# Altium PCB Flow_Pump.PcbDoc (part 3 of 3)
Units mm, origin at the board's own origin, x right, y up, seen from the top; angles counter-clockwise.
Board outline 210 x 210 mm, 2 copper layers (Top Layer, Bottom Layer); 227 components, 178 nets, 654 pads, 724 vias.
Unrouted connection lines stored in the file: 221.
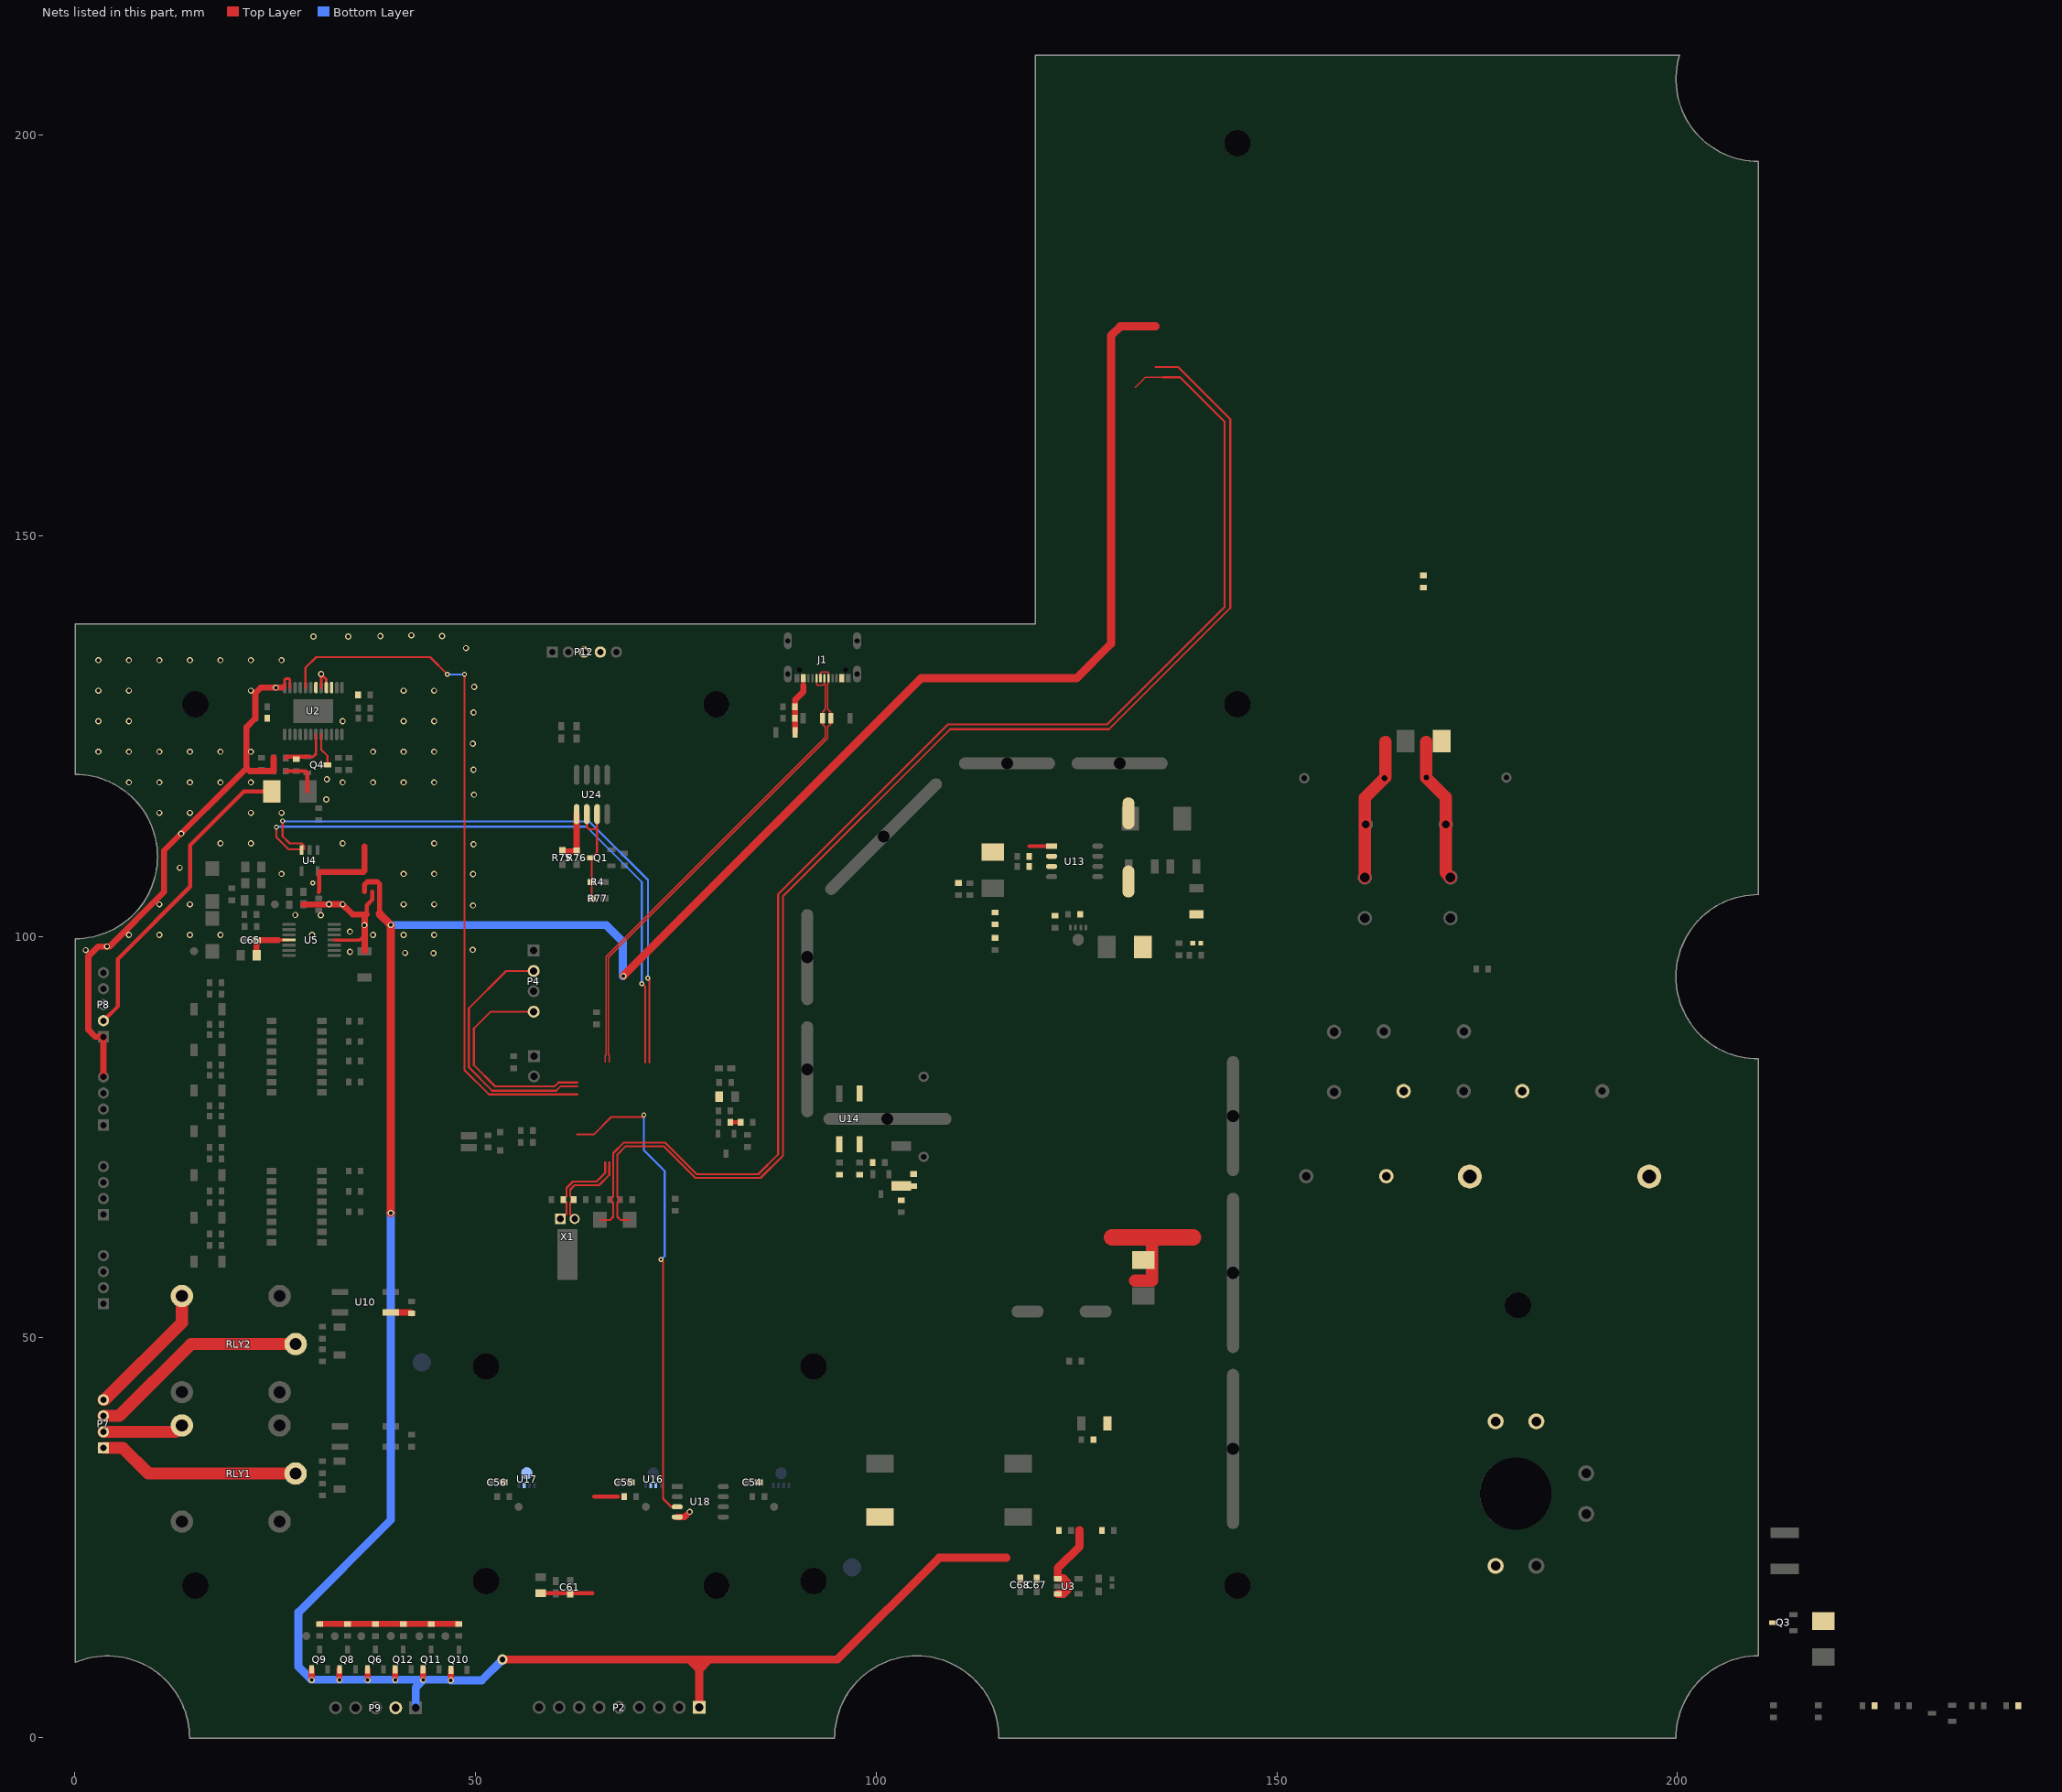
[diagram p3: the nets of this part, all layers, seen from the top]

## Via types
v1: diameter 0.762, hole 0.457, Top Layer to Bottom Layer, tented both sides, 554 vias
v2: diameter 0.61, hole 0.305, Top Layer to Bottom Layer, tented both sides, 99 vias
v3: diameter 0.45, hole 0.25, Top Layer to Bottom Layer, tented both sides, 70 vias
v4: diameter 1.27, hole 0.711, Top Layer to Bottom Layer, tented both sides, 1 vias

## Nets (pads, with @x,y where several pads share a name; then routed paths per layer and width w, separated by ;. In a path a pad name is that pad's centre, name@x,y a point inside that pad or via, vN(x,y) a via of type N, cw(c..) or ccw(c..) an arc to the next point about the centre after c; other vN are vias at no path point) (continued)
NetR45_1: R45.1 U10.1 | length 2.7
  Top Layer w0.762: U10.1@39.418,53.091 41.929,53.091 R45.1@42.037,52.983
NetR61_1: R61.1
NetR62_1: R62.1
NetR63_1: R63.1
NetR83_2: R83.2 R84.1 | length 1.3
  Top Layer w0.508: R83.2@81.788,76.835 R84.1@83.082,76.835
op_3.3v: C65.1 FB2.2 U5.4 | length 5.9
  Top Layer w0.33: 25.385,99.552 25.4,99.567 U5.4@26.712,99.567
  Top Layer w0.762: FB2.2@22.674,97.662 C65.1@22.674,99.552 25.385,99.552
osc_in: C5.1 X1.2 | length 11.2
  Top Layer w0.254: X1.2@60.796,64.86 61.341,65.405 61.341,66.802 C5.1@60.96,67.183 61.341,67.564 61.341,68.617 62.142,69.418 65.1,69.418 66.184,70.502 66.184,71.795
osc_out: C6.1 X1.1 | length 11.4
  Top Layer w0.254: X1.1@62.357,64.77 61.812,65.315 61.812,66.765 C6.1@62.23,67.183 61.798,67.615 61.798,68.402 62.357,68.961 65.405,68.961 66.684,70.24 66.684,71.795
PWM: R59.1
relay_A1: P7.3 RLY2.5 | length 27.7
  Top Layer w1.524: P7.3@3.556,40.186 5.515,40.186 14.478,49.149 RLY2.5@27.547,49.149
relay_A2: P7.1 RLY1.5 | length 25.3
  Top Layer w1.524: P7.1@3.556,36.186 5.978,36.186 9.174,32.99 RLY1.5@27.535,32.99
relay_B1: P7.4 RLY2.2 | length 17.1
  Top Layer w1.524: P7.4@3.556,42.186 3.705,42.186 13.347,51.828 RLY2.2@13.347,55.148
relay_B2: P7.2 RLY1.2 | length 10.1
  Top Layer w1.524: P7.2@3.556,38.186 12.532,38.186 RLY1.2@13.335,38.989
RESX: 
RS485_DIR: Q1.3 Q3.3 Q4.3 R4.1 R16.1 R17.1 R49.2 R50.2 R77.2 U13.2 U13.3 U14.2 U14.3 U24.2 U24.3 | length 13.8
  Top Layer w0.254: U24.2@63.881,115.279 63.881,113.665 64.135,113.411 65.151,113.411 ; R77.2@64.491,104.775 R4.1@64.491,106.807 64.491,109.78 Q1.3@64.429,109.842 65.151,110.564 65.151,113.411 ; U24.3@65.151,115.279 65.151,113.411
rs4851_N: D5.2 FB3.2 P12.3 | length 60.8
  Top Layer w0.254: 62.684,75.295 64.754,75.295 66.929,77.47 70.866,77.47 70.993,77.597 v2(70.993,77.724) ; v2(73.152,59.69) 73.406,59.436 73.406,29.845 74.417,28.834 75.159,28.834
  Bottom Layer w0.254: v2(70.993,77.724) 70.993,73.33 73.584,70.739 73.584,60.122 v2(73.152,59.69)
rs4851_P: D14.2 FB1.2 P12.4
rs4852_N: D18.2 | length 17.6
  Top Layer w1.524: 132.3,57.079 134.4,57.079 134.4,62.386 134.461,62.447
  Top Layer w2.032: 129.411,62.447 134.461,62.447 139.511,62.447
rs4852_P: D19.2
rs4853_N: D20.2
rs4853_P: D21.2
RTN: C42.2 C44.2 C45.2 P10.1 R64.1
RUN: 
RX_5V: R15.1 R18.1 R46.1 R75.1 R76.1 U13.1 U14.1 U24.1 | length 9.2
  Top Layer w0.508: 119.1,111.289 U13.1@121.883,111.289
  Top Layer w0.762: R75.1@60.833,110.642 62.586,110.642 R76.1@62.611,110.617 U24.1@62.611,115.279
SCL: 
SCLK_AO: U2.6 | length 88.5
  Top Layer w0.254: 28.775,131.068 28.775,133.55 30.099,134.874 44.323,134.874 v2(46.482,132.715) ; v2(48.616,132.715) 48.616,83.337 51.658,80.295 62.684,80.295
  Bottom Layer w0.254: v2(46.482,132.715) v2(48.616,132.715)
SDA: P3.2 | length 5.1
  Top Layer w0.508: 26.308,120.65 27.602,120.65 28.777,120.65 28.999,120.428 28.999,118.194 29.083,118.11
SIOUT0: P8.2 R6.2 R9.2 | length 39.9
  Top Layer w0.508: P8.2@3.556,89.494 5.372,91.31 5.372,97.218 14.376,106.223 14.376,111.404 21.082,118.11 25.083,118.11
SW1:  | length 174
  Top Layer w0.203: 132.334,168.529 133.59,169.785 135.763,169.785
  Top Layer w0.254: 65.509,64.643 66.802,64.643 67.183,65.024 67.183,66.788 66.788,67.183 67.184,67.579 67.184,71.795 67.184,72.969 68.51,74.295 73.635,74.295 77.597,70.333 85.279,70.333 87.757,72.811 87.757,105.283 108.941,126.467 128.803,126.467 143.459,141.122 143.459,164.262 137.936,169.785 135.763,169.785
SW2:  | length 172.3
  Top Layer w0.254: 69.209,64.643 68.072,64.643 67.691,65.024 67.691,66.825 68.049,67.183 67.684,67.548 67.684,71.795 67.684,72.779 68.743,73.838 73.457,73.838 77.419,69.875 85.573,69.875 88.362,72.665 88.362,105.024 109.22,125.882 129.057,125.882 144.17,140.995 144.17,164.567 137.668,171.069 134.874,171.069
SWCLK: P4.2 | length 32.3
  Top Layer w0.254: P4.2@57.252,95.707 53.818,95.707 49.149,91.038 49.149,83.693 52.07,80.772 60.071,80.772 60.591,81.292 62.684,81.292 62.684,81.295
SWD: P4.4 | length 27.1
  Top Layer w0.254: P4.4@57.252,90.627 51.892,90.627 49.784,88.519 49.784,83.947 52.436,81.295 59.832,81.295 60.332,81.795 62.684,81.795
TE: 
USB_N: D3.2 J1.A7 J1.B7 | length 62
  Top Layer w0.152: 66.684,84.295 66.684,85.171 66.586,85.269 66.586,97.356 93.953,124.723 93.953,126.136 94.32,126.503 D3.2@94.32,127.254 94.32,128.005 93.943,128.382 93.943,131.518 94.041,131.615 J1.B7@94.041,132.232 94.041,132.883 93.929,132.994 93.167,132.994 93.041,132.868 J1.A7@93.041,132.232
USB_P: D4.2 J1.A6 J1.B6 | length 61.5
  Top Layer w0.152: 66.184,84.295 66.184,85.171 66.282,85.269 66.282,97.483 93.648,124.849 93.648,126.136 93.281,126.503 D4.2@93.281,127.254 93.281,128.005 93.639,128.363 93.639,131.518 93.541,131.615 ; J1.B6@92.541,132.232 92.541,131.512 92.685,131.369 93.294,131.369 93.541,131.615 ; J1.A6@93.541,132.232 93.541,131.615
VCC_3.3V_F: R57.2 R58.2 R59.2 | length 6.4
  Top Layer w0.254: 30.075,124.421 30.075,125.218
  Top Layer w0.33: 28.999,122.428 29.718,122.428 30.075,122.785 30.075,124.421
  Top Layer w0.508: 26.308,122.301 26.435,122.428 28.999,122.428
VCC_5V: C51.1 C52.1 C54.1 C55.1 C56.1 C61.1 C67.1 C68.1 L2.2 P2.1 P9.2 Q6.1 Q8.1 Q9.1 Q10.1 Q11.1 Q12.1 R53.2 U3.1 U3.3 U17.3 U17.5 | length 390.1
  Top Layer w0.635: 36.138,105.623 36.138,106.47 36.5,106.832 37.744,106.832 38.038,106.539 38.038,105.623 38.038,102.822
  Top Layer w0.762: v1(29.531,7.223) Q9.1@29.531,8.543 ; v1(33.01,7.223) Q8.1@33.01,8.543 ; v1(36.516,7.223) Q6.1@36.516,8.543 ; v1(39.968,7.223) Q12.1@39.968,8.543 ; v1(43.45,7.223) Q11.1@43.45,8.543 ; v1(46.914,7.183) Q10.1@46.914,8.503
  Top Layer w1.016: 38.038,102.822 v1(39.421,101.439) 39.421,99.898 v1(39.421,65.507) ; v4(53.365,9.779) 78.003,9.779 ; v1@68.478,95.123 105.588,132.232 124.993,132.232 129.286,136.525 129.286,174.981 130.454,176.149 132.334,176.149 134.874,176.149 ; 76.683,9.779 77.918,8.543 79.154,9.779 ; P2.1@77.92,3.81 77.92,9.696 78.003,9.779 ; 116.205,22.479 107.848,22.479 95.148,9.779 78.003,9.779 ; U3.3@122.652,17.973 123.383,17.973 123.825,18.415 123.825,19.431 123.317,19.939 122.652,19.939 122.652,21.179 125.373,23.9 125.373,25.908
  Bottom Layer w1.016: v1(39.421,65.507) 39.421,27.203 27.889,15.672 27.889,8.865 29.489,7.264 v1@46.965,7.264 ; v1(39.421,101.439) 66.303,101.439 68.351,99.391 v1@68.351,95.072 ; 42.527,3.75 42.527,6.3 v1(43.45,7.223) ; v1(46.914,7.183) 50.77,7.183 v4(53.365,9.779)
  other v1: 68.453,95.072
VCC_36V: C42.1 C50.1 F1.2 U16.2 U16.3 | length 4.1
  Top Layer w0.254: 30.725,125.218 30.725,123.326 31.499,122.552 31.499,121.428
VCC_36V_F: C71.2 C73.1 U18.3 U18.4 | length 96.2
  Top Layer w0.33: 26.175,131.068 26.175,132.049 26.333,132.207 26.67,132.207 26.825,132.052 26.825,131.068 ; 30.725,131.068 v1(30.725,132.757) 31.375,132.107 31.375,131.068
  Top Layer w0.381: 32.351,99.567 35.52,99.567 36.156,100.203
  Top Layer w0.508: 36.41,102.743 36.41,103.897 37.088,104.575 37.088,105.623
  Top Layer w0.762: 3.556,82.477 3.556,87.494 2.549,87.494 1.676,88.367 1.676,97.536 2.883,98.742 4.305,98.742 11.125,105.562 11.125,110.744 21.412,121.031 ; 24.808,122.301 24.808,120.65 21.793,120.65 21.412,121.031 ; 25.908,131.068 23.194,131.068 22.511,130.385 22.511,128.651 22.511,127.254 21.412,126.155 21.412,121.031 ; 28.516,104.013 30.403,104.013 v1@31.725,104.013 ; v1(31.699,104.038) 33.376,104.038 34.671,102.743 36.41,102.743 36.156,102.489 36.156,100.203 36.156,98.164 36.144,98.153 ; U18.4@75.159,27.564 76.078,27.564 v1(76.733,28.219)
  other v1: 44.755,97.917 41.199,97.968 34.315,98.095 1.346,98.298 49.632,98.335 3.988,98.755 6.731,100.203 10.541,100.203 14.351,100.203 18.161,100.203 29.591,100.203 37.211,100.203 41.021,100.203 44.831,100.203 34.315,100.635 36.131,101.422 30.683,102.667 27.508,102.692 49.682,103.886 10.541,104.013 14.351,104.013 33.401,104.013 41.021,104.013 44.831,104.013 49.682,107.798 25.781,107.823 41.021,107.823 44.831,107.823 13.081,108.585 49.733,111.506 18.161,111.633 21.971,111.633 33.401,111.633 44.831,111.633 13.259,112.852 10.541,115.443 14.351,115.443 21.971,115.443 25.781,115.443 31.375,117.119 49.784,117.704 6.731,119.253 10.541,119.253 14.351,119.253 18.161,119.253 21.971,119.253 33.401,119.253 37.211,119.253 41.021,119.253 44.831,119.253 31.445,119.634 49.733,120.828 2.921,123.063 6.731,123.063 10.541,123.063 14.351,123.063 18.161,123.063 21.971,123.063 37.211,123.063 41.021,123.063 44.831,123.063 49.657,124.079 2.921,126.873 6.731,126.873 33.401,126.873 41.021,126.873 44.831,126.873 49.733,127.965 2.921,130.683 6.731,130.683 21.971,130.683 41.021,130.683 44.831,130.683 25.07,131.068 49.835,131.166 2.921,134.493 6.731,134.493 10.541,134.493 14.351,134.493 18.161,134.493 21.971,134.493 25.781,134.493 48.793,135.992 29.769,137.439 34.112,137.439 38.125,137.49 45.822,137.49 41.986,137.592
  other v2: 29.667,106.68
VCC_36V_IN: C44.1 C45.1 F1.1 P10.2 | length 18
  Top Layer w1.524: 160.968,107.387 160.968,117.31 163.53,119.872 163.53,124.308
VCC_DVDD: C72.1 R60.2 R65.1 R66.1 | length 18.2
  Top Layer w1.524: 168.631,124.308 168.631,119.841 171.08,117.391 171.08,113.991 171.08,107.975 171.668,107.387
VCC_MCU_3.3V: R24.1 R38.1 R39.1 R92.1 R93.1 R94.1 | length 17.3
  Top Layer w0.762: R39.1@30.531,14.218 R38.1@34.01,14.218 R93.1@44.45,14.218 R92.1@47.875,14.218
VDS: R66.2 R68.1 | length 9.4
  Top Layer w0.508: 58.111,18.064 64.533,18.064 64.558,18.039 ; 64.78,30.104 67.748,30.104
VFB: U2.3 U2.4 U4.3 | length 164.3
  Top Layer w0.254: v2(25.146,113.665) 25.146,112.415 26.687,110.874 U4.3@28.153,110.874 ; v2(25.908,114.427) 25.908,112.522 26.797,111.633 28.321,111.633 28.603,111.351 28.603,110.874 ; v2(70.739,94.132) 71.184,93.687 71.184,84.295 ; v2(71.501,94.818) 71.684,94.635 71.684,84.295
  Top Layer w0.508: 30.403,105.562 30.484,105.643 30.484,108.074
  Top Layer w0.762: 30.611,108.074 36.004,108.074 36.138,108.207 36.138,108.573 36.138,111.245 36.131,111.252
  Bottom Layer w0.254: v2(25.146,113.665) 25.197,113.716 63.822,113.716 70.739,106.799 v2(70.739,94.132) ; v2(25.908,114.427) 25.959,114.376 64.186,114.376 71.501,107.061 v2(71.501,94.818)
VUSB: C3.2 C4.2 D2.2 J1.A4 J1.A9 J1.B4 J1.B9 | length 6.3
  Top Layer w0.762: D2.2@89.862,125.476 C4.2@89.862,127.254 C3.2@89.862,128.651 89.862,129.511 90.891,130.54 90.891,131.334
WARN: 
pads on no net: C7.0 C24.0 C54.0 C55.0 C56.0 C60.0 C61.0 C62.0 C65.0 C66.0 C67.0 C68.0 C69.0 C70.0 J1.2 J1.A5 J1.A8 J1.B5 J1.B8 P6.1 P8.3 P8.4 P8.5 P12.2 P12.5 R4.0 R21.0 R75.0 R76.0 R77.0 RLY1.3 RLY2.3 U2.9 U2.10 U2.11 U2.12 U2.13 U2.14 U2.15 U2.16 U2.17 U2.18 U2.19 U2.20 U2.21 U2.22 U2.23 U2.24 U2.25 U3.4 U5.5 U5.6 U5.7 U5.8 U5.9 U5.10 U5.12 U5.13 U5.14 U7.7 U7.8 U7.9 U7.10 U12.4 U15.4 U16.4 X1.3
copper on no net: | length 2435.3
  Top Layer w0.203: 132.334,165.989 133.604,167.259 135.416,167.259 ; 132.334,171.069 133.604,172.339 135.416,172.339
  Top Layer w0.254: 27.475,131.068 27.475,133.811 29.681,136.017 45.237,136.017 47.193,134.061 47.193,82.982 50.88,79.295 62.684,79.295 ; 28.125,131.068 28.125,133.721 29.913,135.509 44.679,135.509 v2(46.482,133.706) ; v1(28.153,107.223) 28.153,108.074 ; 28.603,108.074 28.603,108.799 29.278,109.474 29.503,109.249 29.503,108.074 29.503,107.581 29.616,107.467 29.794,107.467 29.951,107.624 29.951,108.074 ; 30.403,110.874 30.403,113.733 30.421,113.751 ; 43.272,28.829 42.291,28.829 41.504,29.616 41.504,33.68 44.145,36.322 44.145,62.941 49.708,68.504 v2(50.825,68.504) ; 43.272,30.099 42.443,30.099 42.037,30.505 42.037,33.565 44.704,36.232 44.704,62.687 49.835,67.818 v2(56.058,67.818) ; v2(47.93,133.579) 47.93,83.109 51.244,79.795 62.684,79.795 ; v2(49.276,77.216) 49.855,77.795 62.684,77.795 ; v2(50.165,76.708) 50.752,77.295 62.684,77.295 ; v2(51.486,67.107) 55.829,67.107 57.404,65.532 57.404,29.464 58.034,28.834 59.03,28.834 ; 53.487,27.564 54.351,27.564 v3(54.559,27.356) ; v2(56.439,69.063) 57.912,67.589 57.912,30.358 58.166,30.104 59.03,30.104 ; v2(60.681,75.108) 61.443,75.108 61.755,74.795 62.684,74.795 ; 62.684,76.295 65.043,76.295 66.624,77.876 68.91,77.876 74.066,83.033 74.066,95.885 107.29,129.108 127,129.108 139.852,141.961 139.852,163.906 136.5,167.259 135.416,167.259 ; 62.684,76.795 64.857,76.795 66.421,78.359 68.661,78.359 73.533,83.231 73.533,96.19 107.01,129.667 126.695,129.667 139.217,142.189 139.217,163.398 136.627,165.989 134.874,165.989 ; 63.564,135.509 63.564,135.318 64.262,134.62 64.262,122.047 63.881,121.666 63.881,120.179 ; 65.151,120.179 65.151,121.666 64.77,122.047 64.77,134.715 65.564,135.509 ; 66.058,21.96 66.058,18.397 66.416,18.039 67.158,18.039 67.158,16.944 ; 67.184,84.295 67.184,86.031 68.184,87.031 68.184,93.378 106.047,131.242 125.705,131.242 137.414,142.951 v2(137.414,159.893) ; 68.184,71.795 68.148,71.759 68.148,69.901 68.961,69.088 70.268,69.088 71.501,67.855 71.501,64.643 71.882,64.262 71.882,62.865 ; v2(68.834,70.355) 69.184,70.705 69.184,71.795 ; 69.362,27.564 70.226,27.564 v3(70.485,27.305) ; 69.684,71.795 69.684,70.397 v2(69.977,70.104) ; 69.684,84.295 69.684,92.719 69.317,93.086 69.317,93.701 106.299,130.683 125.984,130.683 138.1,142.799 138.1,160.223 137.414,160.909 134.874,160.909 ; 70.184,71.795 70.184,72.789 70.775,73.381 73.254,73.381 77.241,69.393 86.004,69.393 88.9,72.288 88.9,104.75 109.499,125.349 129.388,125.349 144.831,140.792 144.831,165.049 137.541,172.339 135.416,172.339 ; 70.684,71.795 70.684,69.397 72.39,67.691 72.39,67.286 73.66,67.286 ; 72.184,71.795 72.184,72.743 72.415,72.974 73.025,72.974 74.346,71.653 v1(74.346,70.815) ; 72.684,84.295 72.684,94.564 72.949,94.829 72.949,96.469 106.629,130.15 126.289,130.15 138.659,142.519 138.659,161.417 136.627,163.449 134.874,163.449 ; 75.184,74.295 76.784,74.295 80.264,70.815 84.988,70.815 87.097,72.923 87.097,105.512 108.585,127 128.524,127 142.697,141.173 v2(142.697,158.14) ; 75.184,75.795 76.046,75.795 80.54,71.301 84.763,71.301 86.563,73.101 86.563,105.842 108.255,127.533 128.143,127.533 141.986,141.376 141.986,164.592 137.795,168.783 v2(136.906,168.783) ; 75.184,76.295 76.314,76.295 80.854,71.755 84.455,71.755 85.979,73.279 85.979,106.096 107.95,128.067 127.737,128.067 141.224,141.554 v2(141.224,158.877) ; 75.184,80.795 74.094,80.795 73.812,81.077 73.812,82.067 74.549,82.804 74.549,95.555 107.594,128.6 127.356,128.6 140.513,141.757 140.513,164.617 137.77,167.361 v2(137.744,167.361) ; 75.184,81.295 75.224,81.255 76.327,81.255 76.632,80.95 v1(78.08,80.95) ; 85.364,27.564 86.228,27.564 v3(86.487,27.305)
  Top Layer w0.381: 73.66,65.786 73.66,65.405 75.755,63.309 75.755,35.605 77.978,33.382 v2(77.978,29.591)
  Top Layer w0.508: 49.022,27.559 51.908,27.559 51.913,27.564 ; 63.167,21.96 64.558,21.96 64.558,20.039 ; 64.78,27.564 67.748,27.564 ; 67.158,19.039 68.185,19.039 68.724,18.5 70.219,18.5 ; 67.158,20.039 67.509,20.39 67.509,21.96 ; 106.99,25.852 107.061,25.923 107.061,29.023 ; 108.966,31.623 109.601,32.258 109.601,34.223 109.601,36.991 109.831,37.221 109.831,38.712 110.372,39.253 111.581,39.253 ; 109.653,25.908 110.871,25.908 110.871,29.023 ; 110.871,34.223 110.871,37.084 110.998,37.211 ; 128.143,34.223 128.143,37.06 128.294,37.211
  Top Layer w0.635: 43.272,31.369 43.272,33.391 45.568,35.687 53.594,35.687 v3(53.976,35.305) 53.976,33.66
  Top Layer w0.762: 43.272,27.559 44.577,27.559 46.152,25.984 v1(54.423,25.984) 56.003,27.564 59.03,27.564 ; 59.03,31.374 v3(59.03,33.401) ; 69.812,33.66 v3(69.812,35.268) ; 75.159,31.374 v3(75.159,33.401) ; 85.827,33.66 v3(85.827,35.268) ; v1(98.621,60.089) 95.391,60.089 95.391,52.335 104.457,43.269 ; 101.957,22.479 101.957,23.801 102.667,24.511 103.707,24.511 103.607,24.611 v1(103.607,26.187) ; 104.457,37.846 104.457,43.269 ; 108.331,34.223 108.331,37.221 ; 112.371,25.908 v1(113.792,25.908) ; 112.498,37.211 113.03,37.211 113.538,37.719 v3(113.538,41.148) ; 114.806,103.01 114.819,102.997 v1(116.357,102.997) ; 117.6,111.289 117.6,110.019 117.6,108.749 117.6,108.181 118.302,107.479 121.883,107.479 ; 119.38,22.479 119.38,23.698 120.193,24.511 121.031,24.511 v1(122.809,24.511) ; 121.729,37.846 121.729,41.263 119.812,43.18 104.546,43.18 104.457,43.269 ; 125.476,41.783 v3@125.476,42.799 ; 125.67,41.783 126.051,41.402 ; 125.857,41.402 130.175,41.402 131.064,40.513 131.064,37.846 130.429,37.211 129.794,37.211
  Top Layer w1.016: 70.219,18.5 v3(72.009,18.5) v3(72.644,18.5) v3(73.279,18.5) v3(73.914,18.5) ; 97.931,80.428 103.844,80.428 105.918,82.502 ; 108.331,37.221 108.331,39.253 v3(108.331,41.148) ; 132.969,111.125 137.16,111.125 138.197,112.162 138.197,114.718
  Top Layer w1.778: 102.36,93.772 102.36,86.06 105.918,82.502 114.379,82.502 116.761,84.884 116.761,92.747 ; 135.382,104.431 135.396,104.445 v1@137.516,104.445
  Top Layer w2.032: 138.197,114.718 148.739,114.718 158.43,124.409 158.43,147.381 164.661,153.612 173.845,153.612 181.229,146.228 181.229,122.432 178.634,119.837
  Bottom Layer w0.203: 132.334,173.609 133.604,174.879 135.416,174.879
  Bottom Layer w0.254: v2(46.482,133.706) 47.904,133.706 47.93,133.68 v2(47.93,133.579) ; v2(49.276,77.216) 49.276,70.053 v2(50.825,68.504) ; v2(50.165,76.708) 50.165,70.444 51.511,69.098 51.511,67.132 v2(51.486,67.107) ; v3(54.559,27.356) 54.864,27.051 55.413,27.051 ; v2(56.058,67.818) 56.134,67.818 56.159,67.793 58.036,69.669 69.542,69.669 v2(69.977,70.104) ; v2(56.439,69.063) 57.731,70.355 v2(68.834,70.355) ; v3(70.485,27.305) 70.739,27.051 71.288,27.051 ; v3(86.487,27.305) 86.741,27.051 87.145,27.051 ; 132.334,160.909 132.334,159.639 133.096,158.877 v2(141.224,158.877) ; 132.334,163.449 130.734,161.849 130.734,159.817 132.41,158.14 v2(142.697,158.14) ; 134.874,168.529 137.414,165.989 v2(137.414,159.893) ; 135.128,173.609 134.874,173.609 136.906,171.577 v2(136.906,168.783) ; 135.416,174.879 135.941,174.879 137.744,173.076 v2(137.744,167.361)
  Bottom Layer w0.381: v2(66.04,21.209) 68.301,23.47 73.66,23.47 77.978,27.788 v2(77.978,29.591)
  Bottom Layer w1.016: 56.388,33.026 88.12,33.026 90.303,33.026 100.076,42.799 v3@125.476,42.799
  Bottom Layer w1.778: 116.761,92.747 116.761,103.789 127.653,114.681 v1(140.36,114.681) v1(141.478,114.681) 141.478,106.426 139.483,104.431 139.469,104.445 v1(136.652,104.445) ; 139.268,114.63 141.263,112.635
  other v1: 51.867,25.908 49.149,25.984 101.498,46.228 95.631,54.483 137.516,104.47 119.812,107.493 120.726,107.493
  other v3: 56.231,25.019 56.881,25.019 57.531,25.019 72.065,25.019 72.715,25.019 73.365,25.019 87.963,25.019 88.613,25.019 89.263,25.019 56.231,25.654 56.881,25.654 57.531,25.654 72.065,25.654 72.715,25.654 73.365,25.654 87.963,25.654 88.613,25.654 89.263,25.654 56.231,26.289 56.881,26.289 57.531,26.289 72.065,26.289 72.715,26.289 73.365,26.289 87.963,26.289 88.613,26.289 89.263,26.289 59.03,32.893 75.159,32.893 53.975,34.798 69.812,34.798 85.827,34.798 124.206,40.513 124.968,40.513 125.67,40.513 126.365,40.513 108.331,40.64 124.206,41.275 124.968,41.275 125.67,41.275 126.365,41.275 124.206,42.037 124.968,42.037 125.67,42.037 126.365,42.037 124.206,42.799 124.968,42.799 125.67,42.799 126.365,42.799 124.206,43.561 126.365,43.561 124.206,44.323 126.365,44.323

## Polygon pours and split planes (outlines as drawn)
GND on Bottom Layer "Top Layer-No Net" (solid, remove dead copper, pour order 8): 0.051,96.135 51.308,96.139 51.308,138.989 119.881,138.984 119.881,209.984 146.761,209.984 146.761,140.487 131.216,124.943 130.251,123.977 115.519,123.977 110.439,123.977 90.602,104.14 90.145,103.683 90.145,76.327 108.788,76.327 108.788,59.563 108.814,59.538 138.582,59.538 138.582,9.068 138.582,-0.016 0.067,-0.016 0.051,0
VCC_36V_F on Bottom Layer "Top Layer-No Net" (solid, remove dead copper, pour order 4): 0.055,138.984 50.343,138.984 50.343,97.053 0.055,97.053
GND on Top Layer "Top Layer-No Net" (solid, remove dead copper, pour order 6): 0.051,96.135 51.308,96.139 51.308,138.989 119.881,138.984 119.881,209.984 146.761,209.984 146.761,140.487 131.216,124.943 130.251,123.977 115.519,123.977 110.439,123.977 90.602,104.14 90.145,103.683 90.145,76.327 108.788,76.327 108.788,59.563 108.814,59.538 138.582,59.538 138.582,9.068 138.582,-0.016 0.067,-0.016 0.051,0
VCC_36V_F on Top Layer "Top Layer-No Net" (solid, remove dead copper, pour order 0): 0.055,138.984 50.343,138.984 50.343,97.053 0.055,97.053

## Keep-outs
Keep-Out Layer:
  circle w0.152: c15.055,128.984 r4.5
  circle w0.152: c80.055,128.984 r4.5
  circle w0.152: c145.055,128.984 r4.5
  circle w0.152: c145.055,198.984 r4.5
  circle w0.152: c180.055,53.984 r4.5
  circle w0.152: c145.055,18.984 r4.5
  circle w0.152: c80.055,18.984 r4.5
  circle w0.152: c15.055,18.984 r4.5
  circle w0.152: c51.281,46.355 r3
  circle w0.152: c92.202,46.355 r3
  circle w0.152: c51.281,19.558 r3
  circle w0.152: c92.202,19.558 r3
  lines w0.152: 119.881,138.984 0.055,138.984 0.055,120.234 ; 119.881,138.984 119.881,209.984 200.258,209.984 200.254,209.984 ccw(c210.055,206.984) 210.055,196.734 210.055,196.746 210.055,105.234 ; 0.055,99.734 ccw(c0.055,109.984) 0.055,120.234 ; 0.055,99.734 0.055,99.734 ; 0.055,99.734 0.055,9.421 cw(c4.055,-0.016) 14.305,-0.016 ; 0.055,120.234 0.055,120.234 ; 14.305,-0.016 14.305,-0.016 ; 14.305,-0.016 94.805,-0.016 94.805,-0.016 cw(c105.055,-0.016) 115.305,-0.016 ; 115.305,-0.016 115.305,-0.016 ; 115.305,-0.016 199.805,-0.016 ; 199.805,-0.016 cw(c210.055,-0.016) 210.055,10.234 ; 199.805,-0.016 199.805,-0.016 ; 210.055,10.234 210.055,10.234 ; 210.055,10.234 210.055,84.734 ; 210.055,84.734 cw(c210.055,94.984) 210.055,105.234 ; 210.055,84.734 210.055,84.734 ; 210.055,105.234 210.055,105.234

## Other copper
Top Layer:
  rectangle net GND: 107.366,57.912 123.114,63.932
  rectangle net VUSB: 90.602,131.334 91.186,132.364
  region net NetC58_1: 170.282,72.568 169.443,71.73 163.424,71.73 162.408,70.714 162.408,68.529 163.271,67.666 174.472,67.666 175.895,69.089 175.895,92.685 177.495,94.285 177.495,97.815 175.895,99.415 175.895,102.87 175.006,103.759 171.018,103.759 170.282,103.022
  region net NetC1_1: 174.854,38.151 175.539,37.465 193.421,37.465 199.238,43.282 199.238,71.755 198.349,72.644 194.92,72.644 193.904,71.628 193.904,45.923 189.992,42.012 175.666,42.012 174.854,41.199
  region net NetC58_2: 153.492,97.739 153.492,91.237 147.98,85.725 147.98,34.265 163.322,18.923 183.083,18.923 184.023,19.863 184.023,22.606 183.032,23.597 166.573,23.597 153.06,37.109 153.06,66.192 155.27,68.402 155.27,71.222 153.06,73.431 153.06,83.718 155.677,86.335 163.855,86.335 164.643,87.122 164.643,89.585 163.88,90.348 158.928,90.348 157.937,91.338 157.937,96.291 162.674,101.028 162.674,102.502 161.442,103.734 159.487,103.734
  region net GND: 96.19,132.715 96.19,126.594 96.342,126.403 96.71,126.403 96.926,126.403 97.511,126.987 97.511,130.81 96.774,131.547 96.774,132.715
  region net 24V_F: 13.843,58.57 14.247,58.166 16.891,58.166 17.272,58.547 17.272,94.869 16.891,95.25 14.478,95.25 13.843,94.615
  region: 124.079,45.212 126.492,45.212 126.746,44.958 126.746,38.481 126.111,37.846 126.111,33.528 125.857,33.274 125.349,33.274 125.095,33.528 125.095,35.433 123.825,36.703 123.825,44.958
  region net NetQ3_1: 125.159,54.933 125.158,50.61 125.158,45.529 125.92,45.529 127.19,45.529 128.397,46.736 128.397,48.006 128.397,49.847 129.19,50.609 135.572,50.609 136.207,51.244 136.207,55.441 135.953,55.695 125.92,55.695
  region net VCC_DVDD: 167.183,117.424 168.732,115.875 168.732,107.086 169.471,106.347 172.844,106.347 173.685,107.188 173.685,117.653 170.155,121.183 170.155,124.993 169.41,125.738 167.877,125.738 167.183,125.044
  region net VCC_36V_IN: 158.547,117.678 158.547,107.086 159.389,106.244 162.353,106.244 163.474,107.366 163.474,115.875 164.973,117.373 164.973,125.07 164.33,125.712 162.542,125.712 161.95,125.12 161.95,121.082
  region net NetC21_2: 123.698,97.536 124.333,96.901 127.381,96.901 127.889,96.393 127.889,92.329 128.397,91.821 130.302,91.821 130.937,92.456 130.937,100.076 130.302,100.711 127.484,100.711 127.103,100.33 123.952,100.33 123.698,100.076
  region net NetR62_1: 124.714,100.711 126.365,100.711 126.619,100.965 126.619,101.999 126.873,102.253 128.117,102.253 129.939,102.253 130.302,102.616 130.302,106.172 130.048,106.426 128.27,106.426 128.016,106.172 128.016,105.41 128.016,104.521 127.753,104.258 125.34,104.258 124.714,103.632
  region net NetC49_2: 98.298,38.735 98.298,33.371 98.776,32.893 107.061,32.893 107.442,33.274 107.442,35.179 106.934,35.687 102.616,35.687 101.854,36.449 101.854,38.862 101.473,39.243 98.806,39.243
  region net NetC57_1: 115.57,38.735 115.57,33.371 116.048,32.893 124.333,32.893 124.714,33.274 124.714,35.179 124.206,35.687 119.888,35.687 119.126,36.449 119.126,38.862 118.745,39.243 116.078,39.243
  region net 24V_F: 98.298,22.225 98.806,21.717 100.823,21.717 101.092,21.986 101.092,24.638 102.489,26.035 102.489,28.829 102.235,29.083 98.547,29.083 98.298,28.834
  region net VCC_5V: 115.57,19.839 116.092,19.318 118.237,19.318 120.921,19.318 121.158,19.555 123.193,19.555 123.32,19.682 123.32,20.039 123.32,20.577 123.193,20.704 118.745,20.704 118.364,21.085 118.364,24.638 119.761,26.035 119.761,28.829 119.507,29.083 115.819,29.083 115.57,28.834
  region: 75.692,22.86 76.835,24.003 89.916,24.003 90.297,24.384 90.297,26.416 89.916,26.797 89.281,26.797 86.714,26.797 56.134,26.797 55.638,26.301 55.638,23.876 56.654,22.86
  region net VUSB: 90.728,132.245 90.716,132.257 90.716,132.88 91.91,134.074 94.666,134.074 95.923,132.817 95.923,132.34 95.828,132.245 95.528,132.245 95.528,132.627 94.767,133.388 91.808,133.388 91.173,132.753 91.173,132.245 90.728,132.245 90.716,132.257 90.716,132.88
  region net rs4852_N: 128.118,62.84 128.118,58.217 130.048,56.286 139.141,56.286 141.097,58.242 141.097,62.992 139.929,64.16 129.438,64.16
Bottom Layer:
  region net GLC: 155.778,76.556 157.988,74.346 180.01,74.346 182.093,76.429 182.093,81.026 181.382,81.737 179.755,81.737 179.095,81.077 179.095,77.724 178.359,76.987 168.072,76.987 167.259,77.8 167.259,81.026 166.548,81.737 164.973,81.737 164.287,81.051 164.287,77.749 163.525,76.987 159.233,76.988 158.471,77.749 158.471,81.229 157.963,81.737 156.286,81.737 155.778,81.229
  region: 53.467,33.02 54.102,32.385 92.583,32.385 99.761,39.563 126.05,39.563 127.635,41.148 127.635,44.196 126.746,45.085 97.409,45.085 90.297,37.973 54.864,37.973 53.467,36.576
  region net Motor_W: 55.88,31.877 57.531,31.877 57.785,31.882 58.039,31.623 58.039,28.194 57.785,27.94 55.245,27.94 55.118,28.067 55.118,30.607 55.245,30.734 55.626,30.734 55.88,30.988
  region net Motor_V: 71.653,31.877 73.39,31.877 73.644,31.882 73.898,31.623 73.898,28.194 73.644,27.94 71.104,27.94 70.977,28.067 70.977,30.607 71.104,30.734 71.399,30.734 71.653,30.988
  region net Motor_U: 87.612,31.877 89.263,31.877 89.517,31.882 89.771,31.623 89.771,28.194 89.517,27.94 86.977,27.94 86.85,28.067 86.85,30.607 86.977,30.734 87.358,30.734 87.612,30.988
  region: 55.88,24.821 56.111,24.59 57.61,24.59 57.912,24.892 57.912,27.432 57.785,27.559 56.007,27.559 55.88,27.432
  region: 71.714,24.821 71.945,24.59 73.444,24.59 73.746,24.892 73.746,27.432 73.619,27.559 71.841,27.559 71.714,27.432
  region: 87.612,24.821 87.843,24.59 89.342,24.59 89.644,24.892 89.644,27.432 89.517,27.559 87.739,27.559 87.612,27.432

## Silkscreen, mask and mechanical layers (free items; w line width, h text height)
Top Overlay:
  text "Flow_Pump_V1.0" at 148.565,185.674 h5.08
  text "20241020" at 148.59,179.68 h5.08
  text "GND" at 59.969,129.159 h1.52 r90
  text "NC" at 62.001,129.134 h1.52 r90
  text "485A" at 64.008,129.134 h1.52 r90
  text "485B" at 66.015,129.108 h1.52 r90
  text "NC" at 68.072,129.108 h1.52 r90
  text "NC" at 7.468,95.052 h1.52
  text "NC" at 7.468,93.052 h1.52
  text "NC" at 7.468,91.052 h1.52
  text "AO" at 7.468,89.052 h1.52
  text "AGND" at 7.468,87.052 h1.52
  text "AGND" at 7.468,82.035 h1.52
  text "AI" at 7.468,80.035 h1.52
  text "DI0" at 7.468,78.035 h1.52
  text "DI1" at 7.468,76.035 h1.52
  text "DI2" at 7.468,70.859 h1.52
  text "DI3" at 7.468,68.859 h1.52
  text "GND" at 7.468,66.859 h1.52
  text "NC" at 7.468,64.859 h1.52
  text "DI4" at 7.468,59.747 h1.52
  text "DI5" at 7.468,57.747 h1.52
  text "DI6" at 7.468,55.747 h1.52
  text "GND" at 6.756,53.746 h1.52
  text "B1" at 7.468,41.744 h1.52
  text "A1" at 7.468,39.744 h1.52
  text "B2" at 7.468,37.744 h1.52
  text "A2" at 7.468,35.744 h1.52
  text "W" at 60.861,7.722 h1.52 r90
  text "V" at 63.361,7.722 h1.52 r90
  text "U" at 65.861,7.722 h1.52 r90
  text "GND" at 68.362,7.722 h1.52 r90
  text "HW" at 70.861,7.722 h1.52 r90
  text "HV" at 73.228,7.722 h1.52 r90
  text "HU" at 75.946,7.722 h1.52 r90
  text "5V" at 78.384,7.722 h1.52 r90
  text "PE" at 58.344,7.62 h1.52 r90
  text "EZ" at 24.536,2.946 h1.52 r90
  text "EB" at 25.73,2.946 h1.52 r90
  text "EA" at 26.924,2.946 h1.52 r90
  text "GND" at 28.219,2.946 h1.52 r90
  text "5V" at 29.413,2.921 h1.52 r90
Bottom Solder:
  lines w1.016: 56.515,29.464 59.055,29.464 60.42,28.099 60.42,3.81 ; 62.92,3.81 62.92,28.122 64.008,29.21 71.628,29.21 ; 65.42,3.81 65.42,16.499 70.231,21.311 74.524,21.311 82.55,29.337 87.757,29.337
Mechanical 1:
  lines w0.152: 0.055,9.421 cw(c4.055,-0.016) 14.305,-0.016 94.805,-0.016 ; 0.055,9.426 0.055,99.734 ccw(c0.055,109.984) 0.055,120.234 0.055,138.984 106.378,138.984 119.881,138.984 ; 94.805,-0.016 cw(c105.055,-0.016) 115.305,-0.016 199.805,-0.016 cw(c210.055,-0.016) 210.055,10.234 210.055,84.734 cw(c210.055,94.984) 210.055,105.234 210.055,196.746 ; 119.881,138.984 119.881,209.984 200.258,209.984 ; 200.254,209.984 ccw(c210.055,206.984) 210.055,196.734

## Text inside footprints (layer, text, board x,y; h text height)
SC1: Top Overlay "-" at 48.788,72.659 h1.02; Top Overlay "+" at 48.788,76.408 h1.02